# Allegro board LAYOUT.brd
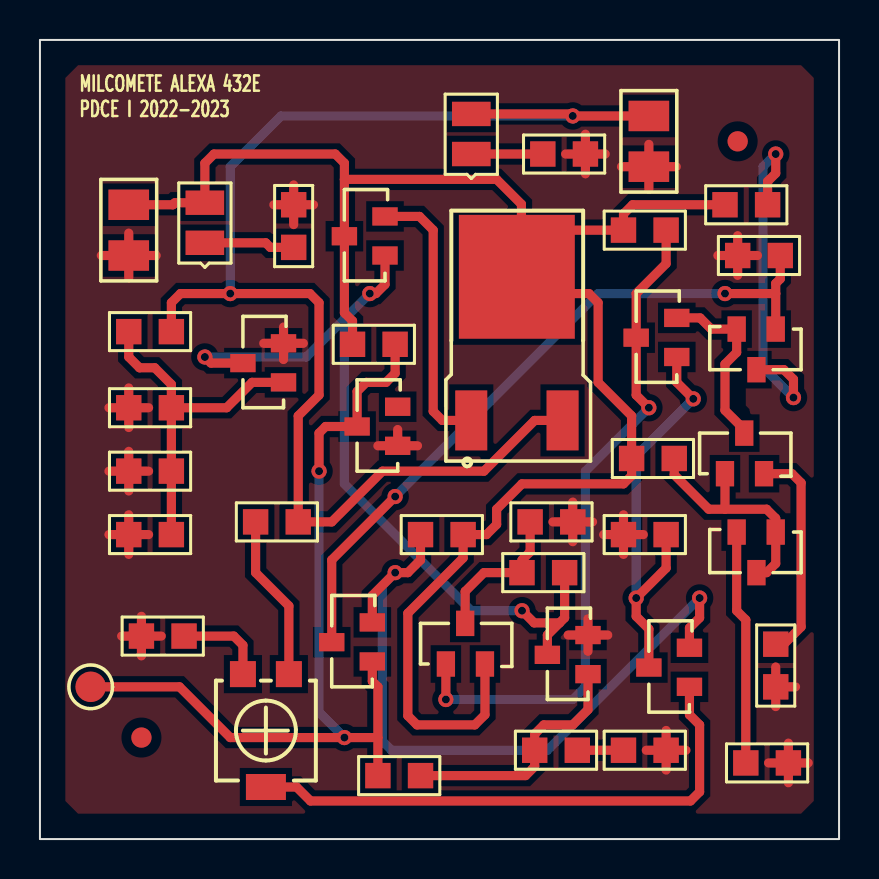
[diagram p0: board, top side]
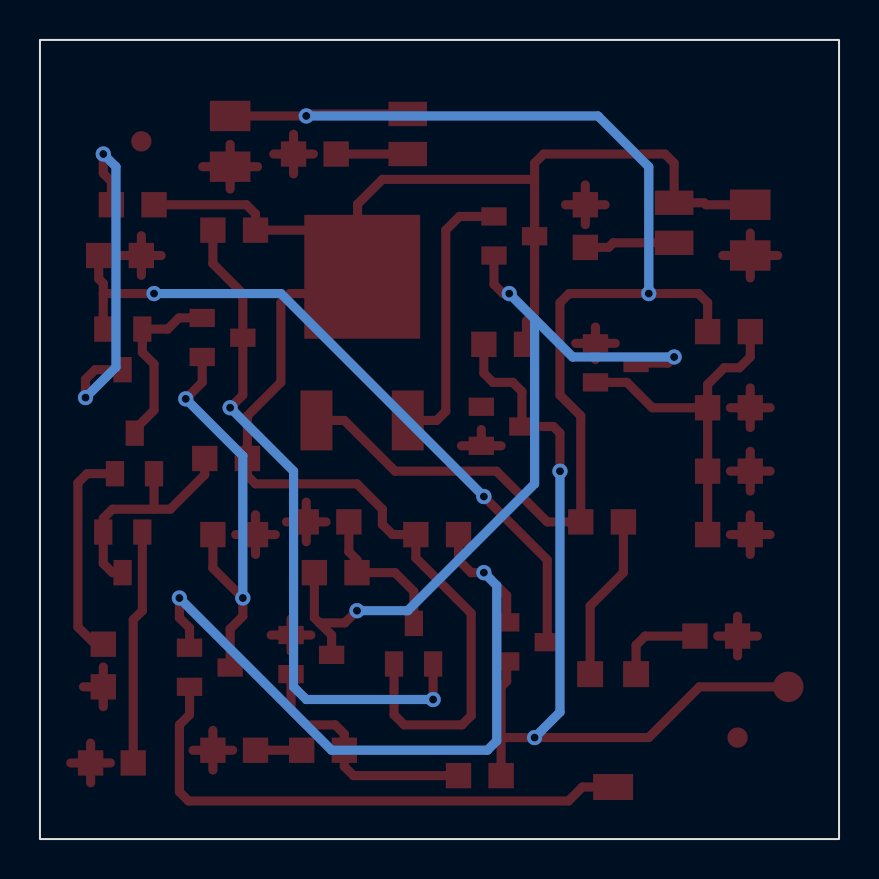
[diagram p1: board, bottom side, seen from below]

Outline 40 x 40 mm; copper layers: TOP, BOTTOM. Coordinates in mm from the lower left corner of the outline.
Outline path: rectangle 0,0 40,40

## Placement (name value [footprint] x y rotation side)
D1  BZX84-C2V7  [TO236]  17.78 19.68 0 top
LED1  1N4148  [SMD0805]  8.26 29.84 90 top
LED2  1N4148  [SMD0805]  21.59 34.29 90 top
NOREF  -  [unnamed]  34.92 34.92 0 top
NOREF#2  -  [#2]  0 0 90 top
NOREF#3  -  [#2]  0 40 0 top
NOREF#4  -  [unnamed]  5.08 5.08 0 top
P1  2K  [TS53YL]  10.16 8.26 90 top
Q1  QBC856B  [TO236]  16.51 8.89 0 top
Q2  QBC856B  [TO236]  32.38 7.62 0 top
Q3  QBC846B  [TO236]  31.75 24.13 0 top
Q4  QBC846B  [TO236]  36.83 25.4 90 top
Q5  QBC846B  [TO236]  36.83 15.24 90 top
Q6  QBC846B  [TO236]  34.29 18.41 270 top
Q7  QBC856B  [TO236]  20.32 8.89 270 top
Q8  QMJD31C  [DPACK]  21.59 20.95 0 top
Q9  QBC846B  [TO236]  17.14 29.21 0 top
Q10  QBC846B  [TO236]  12.06 22.86 0 top
Q11  QBC846B  [TO236]  27.3 8.26 0 top
R3  2.2k  [SMR0805]  17.78 24.77 180 top
R8  5.6K  [SMR0805]  10.79 15.88 0 top
R9  22k  [SMR0805]  19.05 15.24 0 top
R10  2K  [SMR0805]  5.08 10.16 0 top
R12  680  [SMR0805]  4.45 25.4 0 top
R14  470  [SMR0805]  26.67 15.88 180 top
R19  1.5k  [SMR0805]  29.21 30.48 0 top
R20  1.5k  [SMR0805]  34.29 31.75 0 top
R26  100  [SMR0805]  37.47 3.81 180 top
R27  15K  [SMR0805]  31.75 19.05 180 top
R28  100  [SMR0805]  36.83 7.62 90 top
R29  10k  [SMR0805]  34.92 29.21 0 top
R30  10k  [SMR0805]  29.21 15.24 0 top
R31  4.7  [SMR0805]  4.45 21.59 0 top
R32  10k  [SMR0805]  24.13 13.34 0 top
R33  100  [SMR0805]  24.77 4.45 0 top
R34  4.7k  [SMR0805]  19.05 3.17 180 top
R35  2.2k  [SMR0805]  12.7 31.75 270 top
R36  1.5k  [SMR0805]  27.3 34.29 180 top
R37  1k  [SMR0805]  29.21 4.45 0 top
R38  4.7  [SMR0805]  4.45 18.41 0 top
R39  4.7  [SMR0805]  4.45 15.24 0 top
VIN  CON2  [JUMPER2]  4.45 31.75 270 top
VO  CON2  [JUMPER2]  30.48 36.2 270 top
VR  CON1  [JUMPER1]  2.54 7.62 0 top

## Library data of the parts
D1 = BZX84-C2V7_0
LED1 LED2 = 1N4148_0
P1 = POT
Q1 Q2 Q7 = QBC856B_0
Q3-Q6 Q9-Q11 = QBC846B_0
Q8 = QMJD31C_0
R3 R9 R10 R12 R27 R29 R30 R32 R35 = r
R8 R14 R19 R20 R26 R28 R31 R33 R34 R36-R39 = R
VIN VO = CON2: User Part Number: ***
VR = CON1: User Part Number: ***

## Footprints (pads in the part's own frame, mm; a bottom-side part is the same pattern mirrored in y, then rotated)
DPACK
  rect 1.6x3 smd: 1(0,0) 3(4.57,0)
  rect 5.8x6.2 smd: 2(2.28,7.19)
JUMPER1
  round 1.524 smd: 1(0,0)
JUMPER2
  rect 1.524x2.032 smd: 1(0,0) 2(2.54,0)
SMD0805
  rect 1.219x1.93 smd: A(2.007,0) C(0,0)
SMR0805
  rect 1.27x1.27 smd: 1(0,0) 2(2.134,0)
TO236
  rect 1.27x0.914 smd: 1(0.127,0) 2(0.127,1.956) 3(-1.905,0.965)
TS53YL
  rect 1.3x1.3 smd: 1(0,0) 3(0,-2.3)
  rect 1.3x2 smd: 2(-5.65,-1.15)
unnamed
  round 1.016 smd: (0,0)

## Nets
VIN: LED1.A(1) Q7.2 Q8.2 Q9.3 R3.2 R9.2 R19.1 R20.1 R27.2 VIN.1
0: D1.1 Q10.2 Q11.2 R10.1 R14.1 R26.1 R28.1 R29.1 R30.1 R31.1 R35.1 R36.1 R37.2 R38.1 R39.1 VIN.2 VO.2
VO: LED2.A(1) Q8.3 R8.2 R12.2 VO.1
VO1: P1.2(T) Q2.1
VREF: D1.3 Q1.1 R3.1 R34.2 VR.1
N296123: Q5.2 R26.2
N296129: P1.1 R10.2
N296147: P1.3(2) R8.1
N296229: Q9.1 Q10.3 Q11.3 R32.2
N296243: Q11.1 R33.1 R34.1
N296379: Q3.3 Q7.1 R19.2
N296395: Q5.1 Q5.3 Q6.1 R27.1
N296861: Q1.2 Q2.2 R9.1
N296929: Q2.3 Q3.1 R30.2
N296933: Q1.3 Q4.1 R29.2
N296965: Q3.2 Q4.2 Q6.3
N296993: Q7.3 R14.2 R32.1
N297101: Q8.1 Q9.2
N297127: Q10.1 R12.1 R31.2 R38.2 R39.2
N297513: LED2.C(2) R36.2
N298308: Q4.3 R20.2
N299124: LED1.C(2) R35.2
N2966951: Q6.2 R28.2
N2973850: R33.2 R37.1

Pads without a net: D1 2

## Via types
v1: diameter 0.762, hole 0.4, TOP to BOTTOM, 17 vias

## Routing (per net, layer and track width the routed paths; a pad name or vN(x,y) marks a point on that pad's centre or on a via; arc(x,y) is an arc through that point)
VIN: length 88.7
  TOP w0.457: Q7.2 22.28,6.22 21.77,5.71 18.87,5.71 18.41,6.17 18.41,11.3 21.18,14.07 R9.2 22.35,15.24 22.86,15.75 22.86,16.51 24.13,17.78 29.21,17.78 29.62,18.19 R27.2 29.62,21.18 27.94,22.86 27.94,26.85 27.48,27.3 24.71,27.3 Q8.2 24.1,28.38 ; R3.2 15.65,25.93 15.24,26.34 Q9.3 15.24,33.02 ; 24.1,28.38 24.1,31.78 22.86,33.02 15.24,33.02 ; 24.1,28.38 26.2,30.48 R19.1 29.21,31.29 29.67,31.75 R20.1 ; 15.24,33.02 15.24,33.83 14.78,34.29 8.71,34.29 8.26,33.83 LED1.A 6.76,31.85 6.65,31.75 VIN.1
0: length 66.6
  TOP w0.457: 30.35,4.45 R37.2 ; R37.2 32.33,4.45 ; R37.2 31.34,5.44 ; R37.2 31.34,3.45 ; 3.45,15.24 R39.1 ; R39.1 4.45,16.23 ; R39.1 4.45,14.25 ; R39.1 5.44,15.24 ; 28.22,15.24 R30.1 ; R30.1 29.21,14.25 ; R30.1 30.2,15.24 ; R30.1 29.21,16.23 ; 26.44,10.21 Q11.2 ; Q11.2 27.43,9.4 ; Q11.2 28.42,10.21 ; Q11.2 27.43,11.02 ; 25.68,15.88 R14.1 ; R14.1 27.66,15.88 ; R14.1 26.67,14.88 ; R14.1 26.67,16.87 ; R35.1 13.69,31.75 ; R35.1 12.7,32.74 ; R35.1 11.71,31.75 ; R35.1 12.7,30.76 ; 29.11,33.66 VO.2 ; VO.2 30.48,32.54 ; VO.2 30.48,34.77 ; VO.2 31.85,33.66 ; 37.47,2.82 R26.1 ; R26.1 37.47,4.8 ; R26.1 38.46,3.81 ; R26.1 36.47,3.81 ; R10.1 6.07,10.16 ; R10.1 4.09,10.16 ; R10.1 5.08,11.15 ; R10.1 5.08,9.17 ; D1.1 17.91,20.5 ; D1.1 16.92,19.68 ; D1.1 18.9,19.68 ; 4.45,17.42 R38.1 ; R38.1 5.44,18.41 ; R38.1 3.45,18.41 ; R38.1 4.45,19.41 ; R28.1 36.83,8.61 ; R28.1 36.83,6.63 ; R28.1 37.82,7.62 ; R36.1 28.3,34.29 ; R36.1 27.3,35.28 ; R36.1 26.31,34.29 ; R36.1 27.3,33.3 ; 33.93,29.21 R29.1 ; R29.1 35.92,29.21 ; R29.1 34.92,28.22 ; R29.1 34.92,30.2 ; 4.45,28.09 VIN.2 ; VIN.2 4.45,30.33 ; VIN.2 3.07,29.21 ; VIN.2 5.82,29.21 ; Q10.2 12.19,25.63 ; Q10.2 11.2,24.82 ; Q10.2 13.18,24.82 ; Q10.2 12.19,24 ; 4.45,20.6 R31.1 ; R31.1 5.44,21.59 ; R31.1 3.45,21.59 ; R31.1 4.45,22.58
VO: length 69.4
  TOP w0.457: VO.1 v1(26.67,36.2) 26.57,36.3 LED2.A ; R12.2 6.58,26.85 7.04,27.3 v1(9.53,27.3) 13.51,27.3 13.97,26.85 13.97,22.23 12.93,21.18 R8.2 14.61,15.88 17.14,18.41 22.23,18.41 24.77,20.95 Q8.3
  BOTTOM w0.457: v1(9.53,27.3) 9.53,33.66 12.06,36.2 v1(26.67,36.2)
VO1: length 27.7
  TOP w0.457: Q2.1 32.51,6.22 33.02,5.71 33.02,2.36 32.56,1.91 13.54,1.91 12.84,2.61 P1.2
VREF: length 44.6
  TOP w0.457: R34.2 16.92,5.08 ; 16.92,5.08 v1(15.24,5.08) 9.53,5.08 6.99,7.62 VR.1 ; 16.92,5.08 16.92,7.62 16.64,7.9 Q1.1 ; R3.1 17.78,23.32 17.32,22.86 16.33,22.86 15.88,22.4 D1.3 14.3,20.65 13.97,20.32 v1(13.97,18.41)
  BOTTOM w0.457: v1(13.97,18.41) 13.97,6.35 v1(15.24,5.08)
N296123: length 11.7
  TOP w0.457: Q5.2 34.87,11.43 35.33,10.97 R26.2
N296129: length 4.6
  TOP w0.457: P1.1 10.16,9.7 9.7,10.16 R10.2
N296147: length 8.3
  TOP w0.457: R8.1 10.79,13.34 12.46,11.67 P1.3
N296229: length 40.4
  TOP w0.457: 26.01,10.82 24.74,10.82 v1(24.13,11.43) ; 26.01,10.82 25.4,10.21 Q11.3 ; 26.01,10.82 26.26,11.07 R32.2 ; Q10.3 8.56,23.83 v1(8.26,24.13) ; v1(16.51,27.3) 16.81,27.3 17.27,27.76 Q9.1
  BOTTOM w0.457: 15.24,26.04 13.34,24.13 v1(8.26,24.13) ; 15.24,26.04 15.24,17.78 21.59,11.43 v1(24.13,11.43) ; 15.24,26.04 v1(16.51,27.3)
N296243: length 12.5
  TOP w0.457: Q11.1 27.43,6.48 26.67,5.71 25.22,5.71 24.77,5.26 R33.1 24.77,3.63 24.31,3.17 R34.1
N296379: length 34.1
  TOP w0.457: v1(30.48,21.59) 29.84,22.23 Q3.3 29.84,27.3 31.34,28.8 R19.2 ; v1(20.32,6.99) Q7.1
  BOTTOM w0.457: v1(20.32,6.99) 26.67,6.99 27.3,7.62 27.3,18.41 v1(30.48,21.59)
N296395: length 12
  TOP w0.457: 34.29,16.51 33.48,16.51 31.75,18.24 R27.1 ; 34.29,16.51 Q6.1 ; 34.29,16.51 36.37,16.51 36.83,16.05 Q5.1 36.83,13.79 36.37,13.34 Q5.3
N296861: length 36.4
  TOP w0.457: v1(33.02,12.06) 33.02,11.07 32.51,10.57 Q2.2 ; Q1.2 16.64,12.19 v1(17.78,13.34) 18.41,13.34 19.05,13.97 R9.1
  BOTTOM w0.457: v1(17.78,13.34) 17.13,12.69 17.13,4.91 17.6,4.45 25.4,4.45 v1(33.02,12.06)
N296929: length 21.1
  TOP w0.457: R30.2 31.34,13.56 v1(29.84,12.06) 29.84,11.15 30.48,10.52 Q2.3 ; Q3.1 31.88,22.86 v1(32.7,22.03)
  BOTTOM w0.457: v1(32.7,22.03) 29.84,19.18 v1(29.84,12.06)
N296933: length 35.6
  TOP w0.457: 36.83,27.3 36.83,25.53 ; 36.83,27.3 36.83,27.81 37.06,28.04 R29.2 ; 36.83,27.3 v1(34.29,27.3) ; 14.61,9.86 14.61,13.97 v1(17.78,17.14)
  BOTTOM w0.457: v1(34.29,27.3) 27.94,27.3 v1(17.78,17.14)
N296965: length 9.1
  TOP w0.457: Q6.3 35.26,20.5 34.29,21.46 34.29,23.77 34.87,24.36 34.87,25.53 33.6,25.53 33.05,26.09 Q3.2
N296993: length 7.5
  TOP w0.457: R14.2 24.54,14.38 24.13,13.97 R32.1 22.23,13.34 21.29,12.39 Q7.3
N297101: length 13.9
  TOP w0.457: Q9.2 19,31.17 19.68,30.48 19.68,21.41 20.14,20.95 Q8.1
N297127: length 17.6
  TOP w0.457: R31.2 R38.2 R39.2 ; R31.2 9.35,21.59 10.62,22.86 Q10.1 ; R31.2 6.58,22.76 5.75,23.59 4.99,23.59 4.45,24.13 R12.1
N297513: length 3.6
  TOP w0.457: R36.2 LED2.C
N298308: length 18.8
  TOP w0.457: v1(36.83,34.29) 36.83,33.32 36.42,32.92 R20.2 ; 35.86,23.5 37.24,23.5 37.72,23.01 v1(37.72,22.1)
  BOTTOM w0.457: v1(37.72,22.1) 36.2,23.62 36.2,33.66 v1(36.83,34.29)
N299124: length 4.5
  TOP w0.457: LED1.C 11.3,29.84 11.53,29.62 R35.2
N2966951: length 10.9
  TOP w0.457: Q6.2 37.64,18.29 38.1,17.83 38.1,10.62 37.24,9.75 R28.2
N2973850: length 2.3
  TOP w0.457: R37.1 R33.2

## Copper pours and planes (outline as drawn; the poured copper is in the pictures)
0 on TOP: 1.27,38.1 1.91,38.73 38.1,38.73 38.73,38.1 38.73,1.91 38.1,1.27 1.91,1.27 1.27,1.91 ; 4 cut-outs

## Text on the board
Ref Des/Silkscreen Top: MILCOMETE ALEXA 432E | PDCE I 2022-2023
XSECTION_CHART: *  SURFACE - AIR 0 MIL | L1: TOP CONDUCTOR - COPPER 0.71 MIL | *  DIELECTRIC - FR-4 57.64 MIL | L2: BOTTOM CONDUCTOR - COPPER 0.71 MIL | DESIGN CROSS SECTION CHART | ___________________________ | TOTAL THICKNESS 59.06 MIL | 1-2 | FIGURE | SIZE | 15.75 | DRILL CHART: TOP to BOTTOM | ALL UNITS ARE IN MILS | PLATED | QTY | 17
